# EAGLE board fe0b5c01cc255cc7ddf0ac5f053f9b71 (EAGLE 7.4.0)
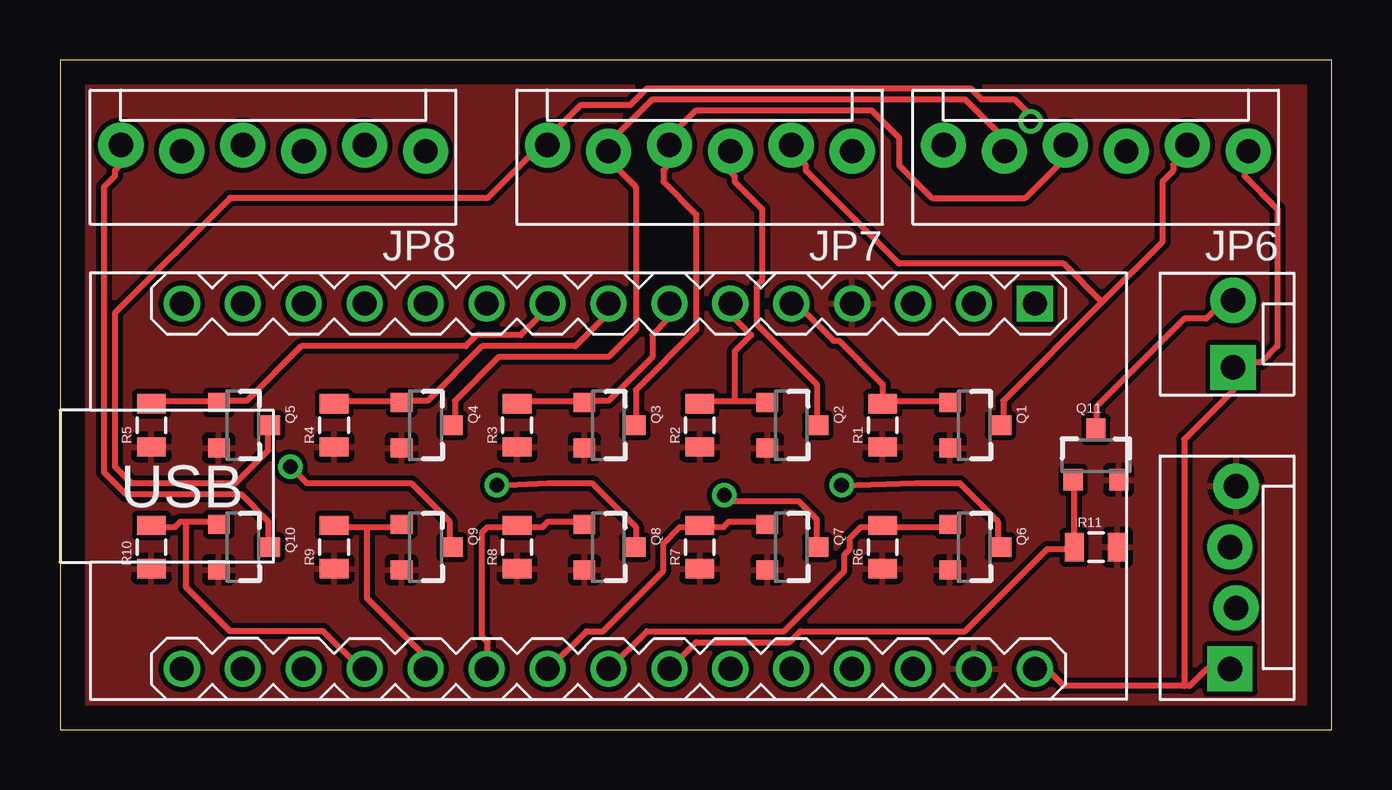
[diagram p0: board, top side]
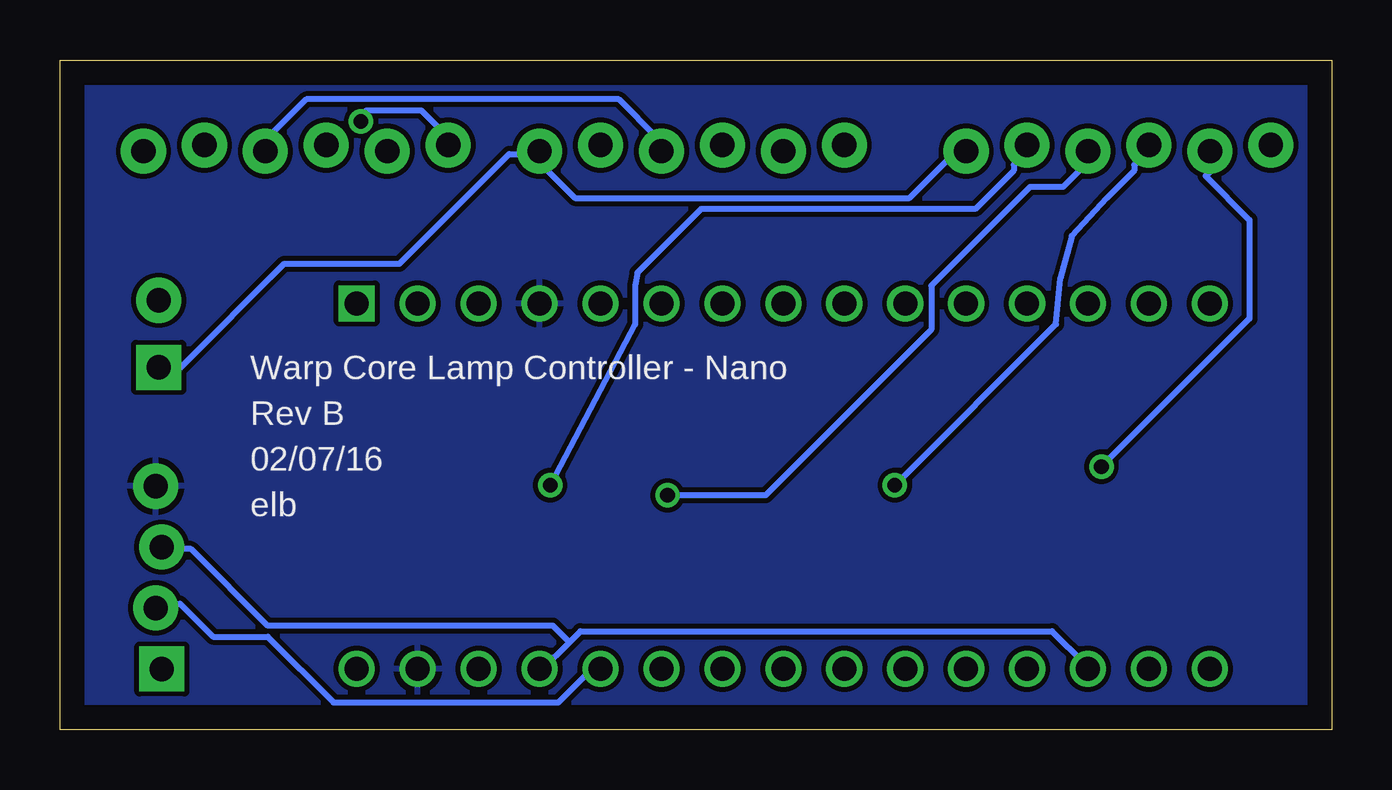
[diagram p1: board, bottom side, seen from below]

Size 53.01 x 27.93 mm. Coordinates in mm from the lower left corner, seen from the top.
Outline: 0,0 53.01,0 53.01,27.93 0,27.93 0,0
Copper layers (1*16): Top 0.035mm / dielectric 1.5mm / Bottom 0.035mm
Design rules "default": minimum track width 10mil, minimum drill 24mil, track to track 8mil, track to pad 8mil, pad to pad 8mil, via to via 8mil, smd to smd 8mil, copper to edge 40mil, drill to drill 8mil, minimum pad ring 10mil, minimum via ring 8mil, stop-mask expansion 4mil, vias tented up to drill 0mil, thermal gap 10mil

## Footprints (pad centres in the part's own frame; a part is rotated, then mirrored left to right if it is on the bottom)
MOLEX-1X2_LOCK = drill 1.016 pad 1.88 square: 1 -0.127,0 | drill 1.016 pad 1.88: 2 2.667,0
MOLEX-1X4_LOCK = drill 1.016 pad 1.88 square: 1 0,0.127 | drill 1.016 pad 1.88: 2 2.54,-0.127; 3 5.08,0.127; 4 7.62,-0.127
MOLEX-1X6_LOCK = drill 1.016 pad 1.88: 1 0,0; 2 2.54,-0.254; 3 5.08,0; 4 7.62,-0.254; 5 10.16,0; 6 12.7,-0.254
ARDUINO-NANO-3.0 = drill 1 square: J1.1 17.78,7.62 | drill 1: J1.2 15.24,7.62; J1.3 12.7,7.62; J1.4 10.16,7.62; J1.5 7.62,7.62; J1.6 5.08,7.62; J1.7 2.54,7.62; J1.8 0,7.62; J1.9 -2.54,7.62; J1.10 -5.08,7.62; J1.11 -7.62,7.62; J1.12 -10.16,7.62; J1.13 -12.7,7.62; J1.14 -15.24,7.62; J1.15 -17.78,7.62; J2.1 17.78,-7.62; J2.2 15.24,-7.62; J2.3 12.7,-7.62; J2.4 10.16,-7.62; J2.5 7.62,-7.62; J2.6 5.08,-7.62; J2.7 2.54,-7.62; J2.8 0,-7.62; J2.9 -2.54,-7.62; J2.10 -5.08,-7.62; J2.11 -7.62,-7.62; J2.12 -10.16,-7.62; J2.13 -12.7,-7.62; J2.14 -15.24,-7.62; J2.15 -17.78,-7.62
SOT23-3 = smd 0.8 x 0.9: 1 -0.95,-1; 2 0.95,-1; 3 0,1.1
0805 = smd 0.8 x 1.2: 1 -0.9,0; 2 0.9,0

## Placement (x,y rotation side)
JP1  [MOLEX-1X2_LOCK]  48.9,15.24 90 top
JP2  [MOLEX-1X4_LOCK]  48.9,2.54 90 top
JP6  [MOLEX-1X6_LOCK]  49.53,24.13 180 top
JP7  [MOLEX-1X6_LOCK]  33.02,24.13 180 top
JP8  [MOLEX-1X6_LOCK]  15.24,24.13 180 top
M1  ARDUINO-NANO-3.0  [ARDUINO-NANO-3.0]  22.86,10.16 0 top
Q1  2N7002  [SOT23-3]  38.1,12.7 270 top
Q2  2N7002  [SOT23-3]  30.48,12.7 270 top
Q3  2N7002  [SOT23-3]  22.86,12.7 270 top
Q4  2N7002  [SOT23-3]  15.24,12.7 270 top
Q5  2N7002  [SOT23-3]  7.62,12.7 270 top
Q6  2N7002  [SOT23-3]  38.1,7.62 270 top
Q7  2N7002  [SOT23-3]  30.48,7.62 270 top
Q8  2N7002  [SOT23-3]  22.86,7.62 270 top
Q9  2N7002  [SOT23-3]  15.24,7.62 270 top
Q10  2N7002  [SOT23-3]  7.62,7.62 270 top
Q11  2N7002  [SOT23-3]  43.18,11.43 0 top
R1  10K  [0805]  34.29,12.7 90 top
R2  10K  [0805]  26.67,12.7 90 top
R3  10K  [0805]  19.05,12.7 90 top
R4  10K  [0805]  11.43,12.7 90 top
R5  10K  [0805]  3.81,12.7 90 top
R6  10K  [0805]  34.29,7.62 90 top
R7  10K  [0805]  26.67,7.62 90 top
R8  10K  [0805]  19.05,7.62 90 top
R9  10K  [0805]  11.43,7.62 90 top
R10  10K  [0805]  3.81,7.62 90 top
R11  10K  [0805]  43.18,7.62 0 top

## Library data of the parts
JP1 JP2 JP6-JP8 = SparkFun-Connectors
M1 = diy-modules
Q1-Q11 = SparkFun-DiscreteSemi; PROD_ID: TRANS-00830
R1-R11 = SparkFun-Passives

## Nets
3V3: M1.J2.14
GND: JP2.4 M1.J1.4 M1.J2.2 Q1.2 Q2.2 Q3.2 Q4.2 Q5.2 Q6.2 Q7.2 Q8.2 Q9.2 Q10.2 Q11.2 R1.1 R2.1 R3.1 R4.1 R5.1 R6.1 R7.1 R8.1 R9.1 R10.1 R11.2
N$1: JP6.6 JP7.6 Q5.3
N$2: M1.J1.5 Q1.1 R1.2
N$3: M1.J1.6 Q2.1 R2.2
N$4: M1.J1.7 Q3.1 R3.2
N$5: M1.J1.8 Q4.1 R4.2
N$6: M1.J1.9 Q5.1 R5.2
N$7: M1.J2.12 Q10.1 R10.2
N$8: JP6.5 JP7.5 Q4.3
N$9: JP6.4 JP7.4 Q3.3
N$10: JP6.3 JP7.3 Q2.3
N$11: JP6.2 JP7.2 Q1.3
N$12: M1.J2.11 Q9.1 R9.2
N$13: M1.J2.9 Q7.1 R7.2
N$14: JP2.3 M1.J2.4 M1.J2.13
N$15: JP2.2 M1.J2.5
N$16: M1.J2.7 Q11.1 R11.1
N$17: JP8.4 Q8.3
N$18: JP8.2 Q6.3
N$20: M1.J2.8 Q6.1 R6.2
N$21: JP1.2 Q11.3
N$22: M1.J2.10 Q8.1 R8.2
N$23: JP8.3 Q7.3
N$24: JP8.5 Q9.3
N$25: JP8.6 Q10.3
VIN: JP1.1 JP2.1 JP6.1 JP7.1 JP8.1 M1.J2.1

## Tracks (layer width: path | path; a pad name or v marks a point on that pad's centre or on a via)
GND
  pour Top: -1.27,29.21 54.61,29.21 54.61,-1.27 -1.27,-1.27
  pour Bottom: -2.54,30.48 55.88,30.48 55.88,-2.54 -2.54,-2.54
N$1  (via drill 0.61)
  Top 0.254: 20.12,24.46 17.83,22.17 7.09,22.17 2.29,17.37 2.29,10.97 2.97,10.29 7.32,10.29 8.69,11.66 8.69,12.57 Q5.3 | v40.46,25.38 40.46,25.6 39.78,26.29 38.41,26.29 37.95,26.75 24.46,26.75 23.77,26.06 21.72,26.06 20.12,24.46 | 20.12,24.46 JP7.6
  Bottom 0.254: v40.46,25.38 40.46,25.6 40.23,25.83 37.95,25.83 37.03,24.92 37.03,24.46 JP6.6
N$2
  Top 0.254: 34.29,13.72 37.03,13.72 Q1.1 | 34.29,13.72 34.29,14.4 32.46,16.23 32.23,16.23 30.63,17.83 M1.J1.5 | 34.29,13.72 R1.2
N$3
  Top 0.254: 28.12,13.72 26.75,13.72 R2.2 | 28.12,13.72 29.26,13.72 Q2.1 | 28.12,13.72 28.12,15.77 28.8,16.46 28.12,17.14 28.12,17.6 M1.J1.6
N$4
  Top 0.254: R3.2 19.2,13.72 21.72,13.72 Q3.1 21.95,13.72 22.86,13.72 24.69,15.54 24.69,16.46 25.38,17.14 25.38,17.6 M1.J1.7
N$5
  Top 0.254: R4.2 11.43,13.72 14.17,13.72 Q4.1 14.4,13.72 15.32,13.72 17.6,16 21.49,16 22.86,17.37 M1.J1.8
N$6
  Top 0.254: R5.2 3.89,13.72 6.4,13.72 Q5.1 6.63,13.72 7.77,13.72 10.06,16 16.92,16 17.37,16.46 19.2,16.46 20.34,17.6 M1.J1.9
N$7
  Top 0.254: 5.26,8.69 5.03,8.69 4.8,8.46 3.89,8.46 R10.2 | 5.26,8.69 6.4,8.69 Q10.1 | 5.26,8.69 5.26,5.94 7.09,4.12 10.97,4.12 12.57,2.52 M1.J2.12
N$8
  Top 0.254: Q4.3 16.46,12.8 16.46,13.72 18.29,15.54 22.86,15.54 24,16.69 24,22.63 22.86,23.77 JP7.5 22.86,24.46 24.69,26.29 37.72,26.29 39.32,24.69 39.32,24.23 JP6.5
N$9
  Top 0.254: Q3.3 24,12.8 24,14.17 26.52,16.69 26.52,21.49 25.15,22.86 25.15,23.32 25.38,23.55 25.38,24.23 JP7.4 25.6,24.46 25.6,24.92 26.52,25.83 33.83,25.83 34.98,24.69 34.98,23.55 36.35,22.17 40.23,22.17 41.83,23.77 41.83,24.23 JP6.4
N$10
  Top 0.254: Q2.3 31.55,12.8 31.55,14.4 29.03,16.92 29.03,18.52 29.26,18.75 29.26,21.72 28.12,22.86 28.12,23.09 27.89,23.32 27.89,24 JP7.3
  Bottom 0.254: JP6.3 44.35,24.23 44.35,24.69 42.75,26.29 29.72,26.29 28.12,24.69 28.12,24.23 JP7.3
N$11
  Top 0.254: 43.43,17.83 45.95,20.34 45.95,22.86 46.41,23.32 46.41,23.55 47.09,24.23 JP6.2 | 43.43,17.83 39.32,13.72 39.32,12.8 Q1.3 | 43.43,17.83 41.83,19.43 34.98,19.43 31.09,23.32 31.09,23.55 30.63,24 30.63,24.23 JP7.2
N$12
  Top 0.254: 12.8,8.46 11.43,8.46 R9.2 | 12.8,8.46 14.17,8.46 Q9.1 | 12.8,8.46 12.8,5.49 15.09,3.2 15.09,2.74 M1.J2.11
N$13
  Top 0.254: Q7.1 29.26,8.69 27.89,8.69 27.66,8.46 26.75,8.46 R7.2 26.52,8.46 25.83,8.46 25.15,7.77 25.15,6.63 22.63,4.12 21.95,4.12 20.34,2.52 M1.J2.9
N$14
  Bottom 0.254: 31.77,3.66 32.92,2.52 M1.J2.4 | 31.77,3.66 31.32,4.12 11.66,4.12 10.29,2.74 M1.J2.13 | 31.77,3.66 32.46,4.34 44.35,4.34 47.55,7.54 48.69,7.54 JP2.3
N$15
  Bottom 0.254: M1.J2.5 30.63,2.52 30.86,2.52 32.23,1.14 41.6,1.14 44.35,3.89 46.63,3.89 48.01,5.26 48.92,5.26 JP2.2
N$16
  Top 0.254: Q11.1 42.29,10.29 42.29,7.77 R11.1 42.06,7.54 41.15,7.54 37.72,4.12 30.86,4.12 30.4,3.66 26.52,3.66 M1.J2.7
N$17  (via drill 0.61)
  Top 0.254: v18.21,10.2 20.34,10.29 22.17,10.29 24,8.46 24,7.77 Q8.3
  Bottom 0.254: v18.21,10.2 11.49,16.92 11.32,18.83 10.83,20.59 9.37,22.17 8.23,23.32 8.23,23.55 7.54,24.23 JP8.4
N$18  (via drill 0.61)
  Top 0.254: v32.58,10.2 35.66,10.29 37.49,10.29 39.09,8.69 39.09,7.77 Q6.3
  Bottom 0.254: v32.58,10.2 29.03,16.92 29.03,18.52 28.94,19.06 26.29,21.72 14.86,21.72 13.26,23.32 13.26,23.55 12.57,24.23 JP8.2
N$20
  Top 0.254: 34.29,8.46 37.03,8.46 Q6.1 | 34.29,8.46 33.38,8.46 32.92,8 32.92,7.54 32.69,7.32 32.69,6.63 30.18,4.12 24.46,4.12 22.86,2.52 M1.J2.8 | 34.29,8.46 R6.2
N$21
  Top 0.254: Q11.3 43.2,12.57 43.2,13.49 46.86,17.14 47.78,17.14 48.69,18.06 JP1.2
N$22
  Top 0.254: Q8.1 21.72,8.69 20.34,8.69 20.12,8.46 19.2,8.46 R8.2 18.97,8.46 17.83,8.46 17.6,8.23 17.6,3.89 17.83,3.66 17.83,2.74 M1.J2.10
N$23  (via drill 0.61)
  Top 0.254: Q7.3 31.55,7.77 31.55,8.78 30.8,9.53 27.94,9.53 v27.69,9.78
  Bottom 0.254: v27.69,9.78 23.6,9.78 16.69,16.69 16.69,18.52 12.57,22.63 11.2,22.63 10.29,23.55 10.29,24 JP8.3
N$24  (via drill 0.61)
  Top 0.254: v9.6,10.97 10.29,10.29 14.63,10.29 16.23,8.69 16.23,7.77 Q9.3
  Bottom 0.254: v9.6,10.97 3.43,17.14 3.43,21.26 5.26,23.09 5.03,23.32 5.03,24 JP8.5
N$25
  Top 0.254: Q10.3 8.69,7.77 8.69,8.69 7.54,9.83 2.74,9.83 1.83,10.74 1.83,22.63 2.29,23.09 2.29,23.32 2.52,23.55 2.52,24.23 JP8.6
VIN
  Top 0.254: 46.86,1.83 47.09,1.83 47.78,2.52 48.69,2.52 JP2.1 | 46.86,1.83 41.83,1.83 41.15,2.52 40.69,2.52 M1.J2.1 | JP6.1 49.38,24 49.38,23.09 50.75,21.72 50.75,16 50.06,15.32 48.92,15.32 JP1.1 48.92,15.09 48.92,14.17 46.86,12.12 46.86,1.83
  Bottom 0.254: JP8.1 15.32,24 15.77,24 17.6,22.17 31.55,22.17 32.92,23.55 32.92,24 JP7.1 33.15,24 34.29,24 38.86,19.43 43.66,19.43 48.01,15.09 48.69,15.09 JP1.1

## Text on the board
bNames: Warp Core Lamp Controller - Nano | Rev B | 02/07/16 | elb